# Altium PCB bh_ai8&di8_alph.PcbDoc
Units mm, origin at the board's own origin, x right, y up, seen from the top; angles counter-clockwise.
Board outline 59 x 39 mm, 2 copper layers (Top Layer, Bottom Layer); 91 components, 86 nets, 275 pads, 18 vias.
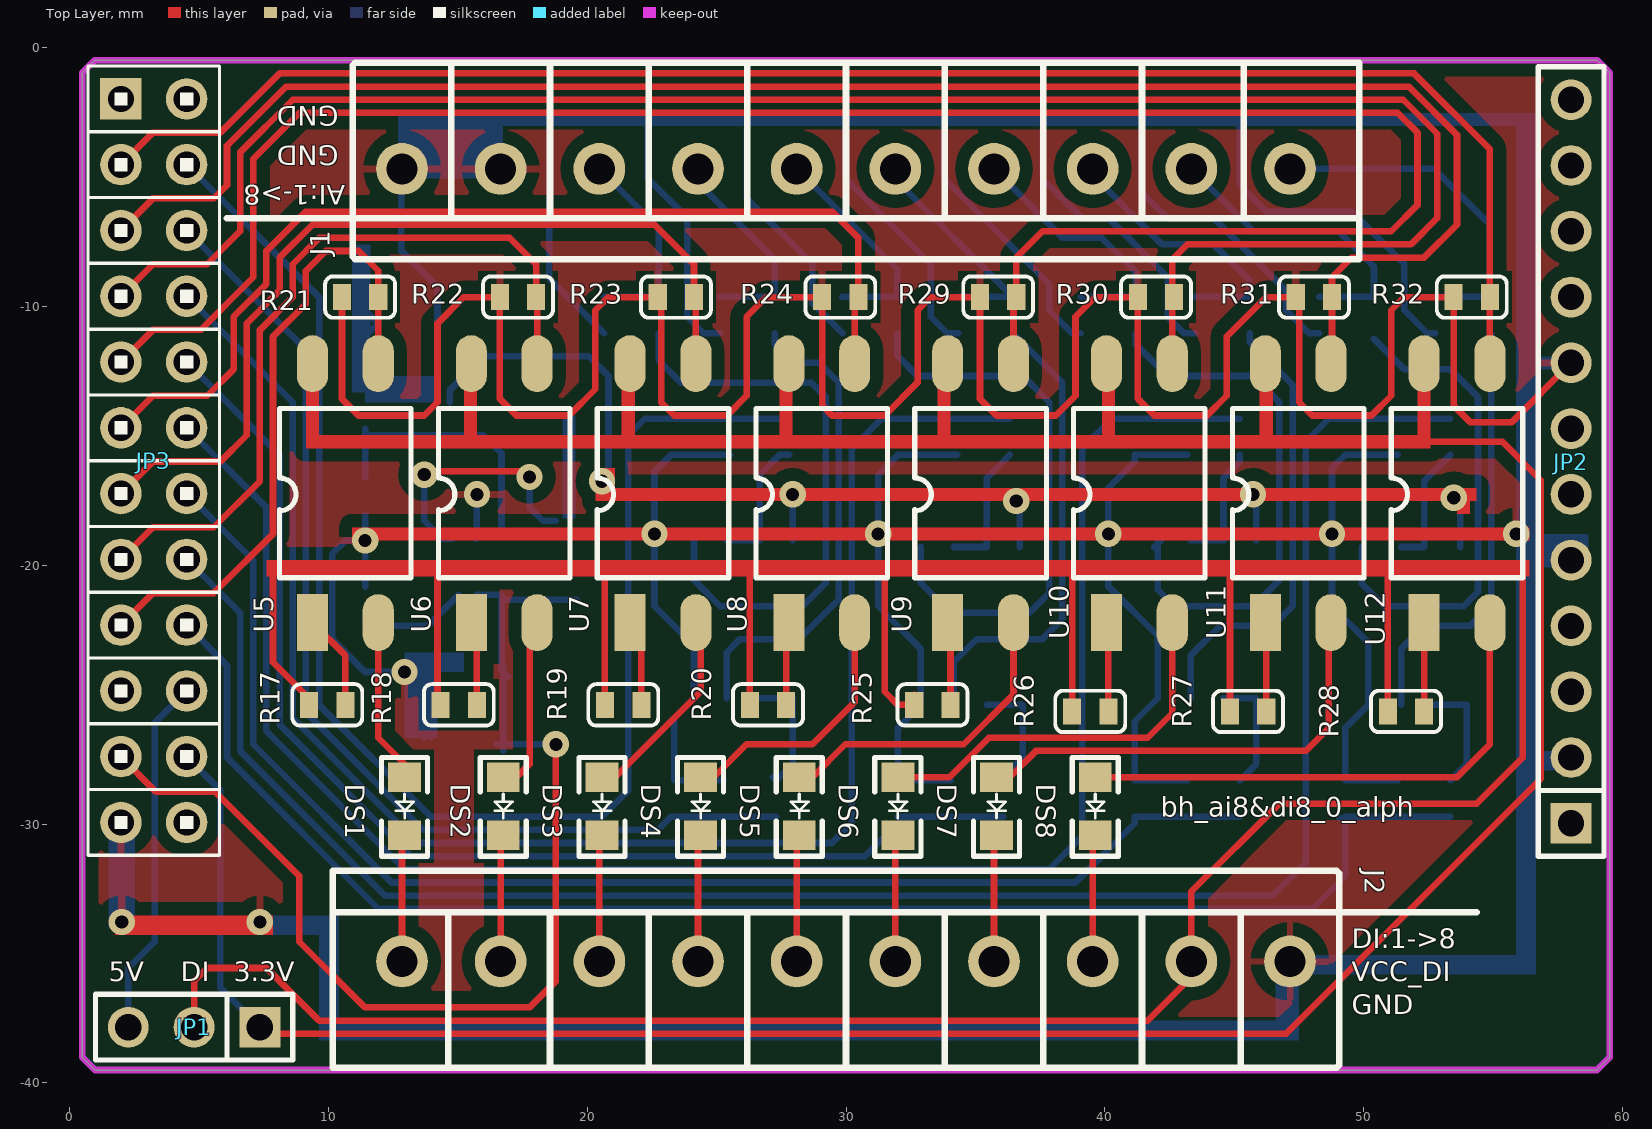
[diagram p0: Top Layer view]
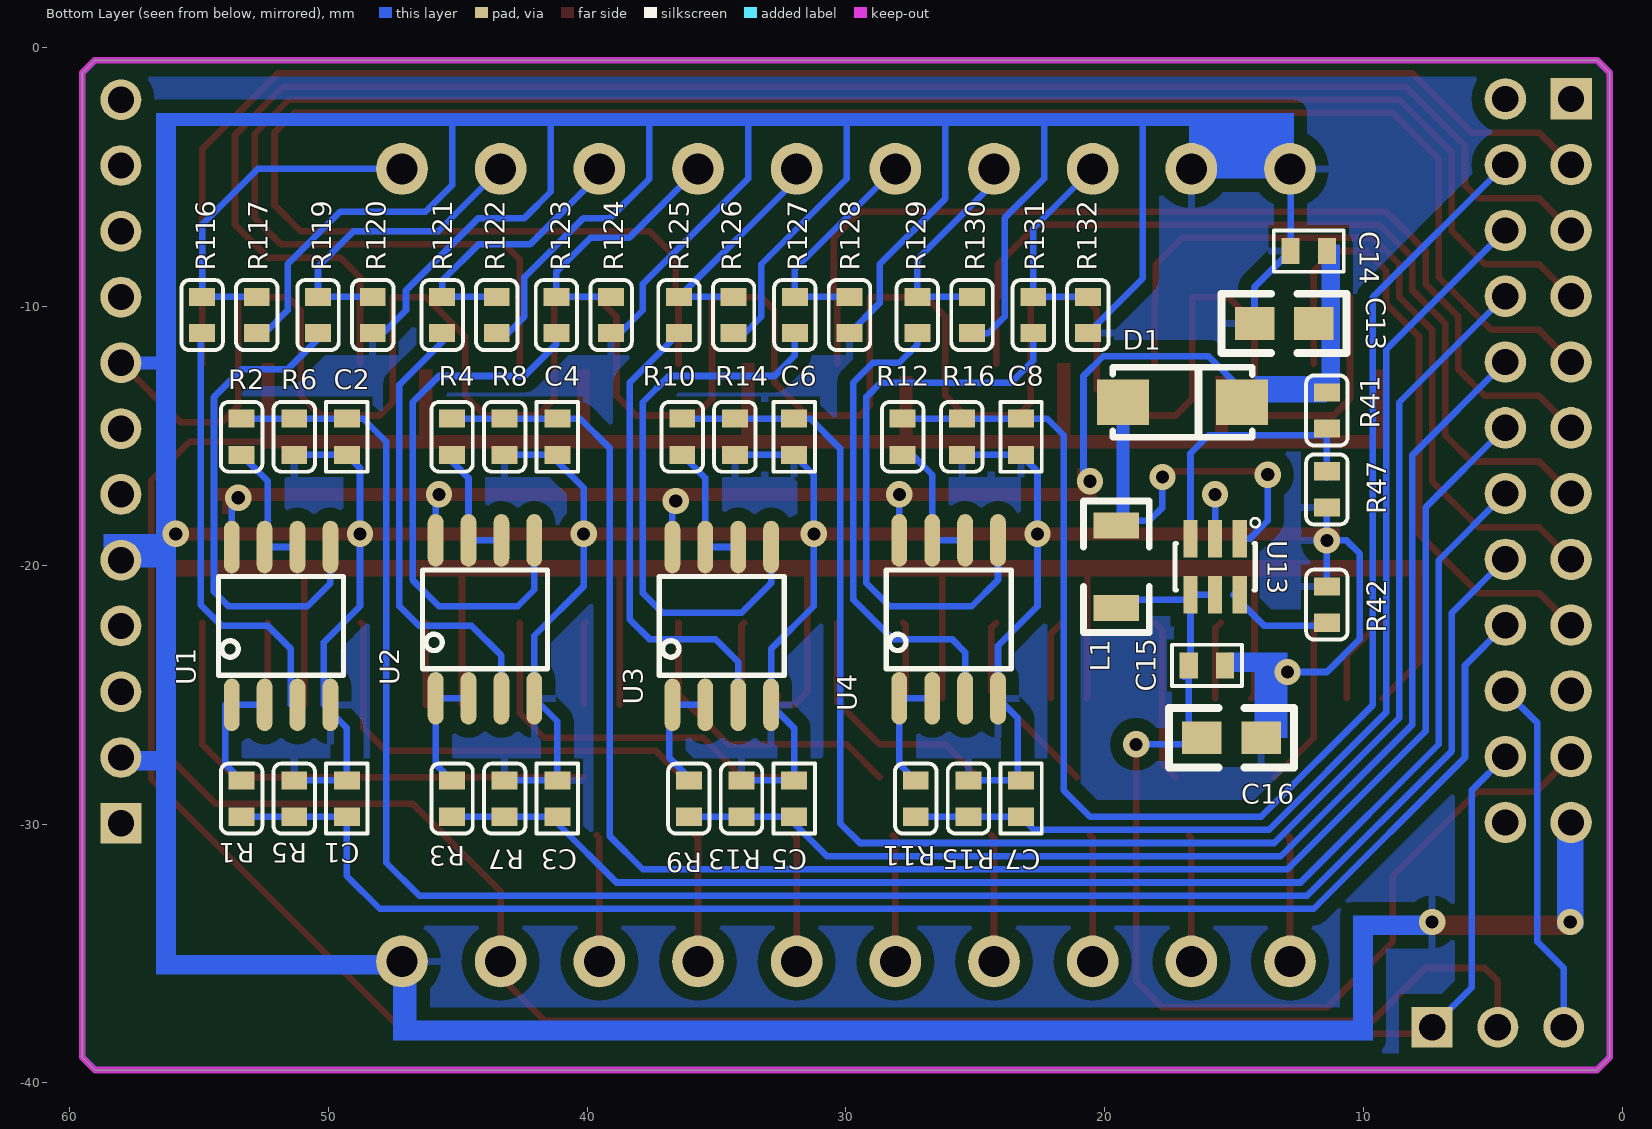
[diagram p1: Bottom Layer view, seen from below]

## Layer stack, top to bottom
Top Layer: signal copper 0.0356
Dielectric: dielectric 0.32, FR-4, Dk 4.8
Bottom Layer: signal copper 0.0356

## Board outline
0.5,-1 1,-0.5 59,-0.5 59.5,-1 59.5,-39 59,-39.5 1,-39.5 0.5,-39

## Design rules (kind name [scope] priority, off if disabled: settings)
Clearance Clearance_1 [(InPolygon)] p1: gap=0.508
Clearance [All] p2: gap=0.254
MinimumSolderMaskSliver [All] p1 off: minsoldermaskwidth=0.254
PolygonConnect [All] p1: connectstyle=Relief reliefconductorwidth=0.254 reliefentries=4 polygonreliefangle="90 Angle"
RoutingVias [All] p1: holewidth=0.508 width=1.016 viastyle="Through Hole" minholewidth=0.508 minwidth=1.016 maxholewidth=0.508 maxwidth=1.016
SilkToSilkClearance [All] p1: silktosilkclearance=0.127
SilkscreenOverComponentPads [All] p1 off: minsilkscreentomaskgap=0.127
SolderMaskExpansion [All] p1: expansion=0.102
Width Width_1 [(InNet('GND') OR InNet('VBUS') OR InNet('VCC_7.2V') OR InNet('VCC_BASE_5V') OR InNet('VCC_DI') OR InNet('VCC_SENSOR_3.3V') OR InNet('VCC_SENSOR_5V'))] p1: maxlimit=0.508 minlimit=0.254 preferedwidth=0.508 minimp=50.000000 maximp=50.000000 favimp=50.000000
Width [All] p2: maxlimit=0.254 minlimit=0.254 preferedwidth=0.254
25 further rules are at their usual default settings.

## Components (designator, comment, footprint, x,y, rotation, side; value= is the part's Value field where it differs from the comment)
C1 "CAP-SMD" C0603 49.276,-29.718 r90 bottom
C2 "CAP-SMD" C0603 49.276,-14.348 r270 bottom
C3 "CAP-SMD" C0603 41.148,-29.718 r90 bottom
C4 "CAP-SMD" C0603 41.148,-14.348 r270 bottom
C5 "CAP-SMD" C0603 32.004,-29.718 r90 bottom
C6 "CAP-SMD" C0603 32.004,-14.348 r270 bottom
C7 "CAP-SMD" C0603 23.241,-29.718 r90 bottom
C8 "CAP-SMD" C0603 23.241,-14.348 r270 bottom
C13 "22uF/16V" C0805 11.938,-10.668 r0 bottom
C14 "0.1uF" C0603 11.43,-7.874 r0 bottom
C15 "0.1uF" C0603 16.764,-23.876 r180 bottom
C16 "10uF/6.3V" C0805 16.256,-26.67 r180 bottom
D1 "SM340A" DO-214 19.304,-13.716 r180 bottom
DS1 "LED" D0805 12.954,-28.194 r270 top
DS2 "LED" D0805 16.764,-28.194 r270 top
DS3 "LED" D0805 20.574,-28.194 r270 top
DS4 "LED" D0805 24.384,-28.194 r270 top
DS5 "LED" D0805 28.194,-28.194 r270 top
DS6 "LED" D0805 32.004,-28.194 r270 top
DS7 "LED" D0805 35.814,-28.194 r270 top
DS8 "LED" D0805 39.624,-28.194 r270 top
J1 "SIP1X10" CON10*0.381 30,-4.699 r90 top
J2 "SIP1X10" CON10*0.381 30,-35.306 r270 top
JP1 "JUMPER3" SIP1X3X2.54 7.366,-37.846 r180 top
JP2 "SPI/UART Connector" SIP1x12x2.54 58,-29.972 r90 top locked
JP3 "Sensor Connector" SIP2X12X2.54 2,-2 r270 top locked
L1 "INDUCTOR" R1206 19.558,-20.066 r90 bottom
R1 "10k 1%" R0603 53.34,-28.318 r270 bottom
R2 "10k 1%" R0603 53.34,-14.348 r270 bottom
R3 "10k 1%" R0603 45.212,-28.318 r270 bottom
R4 "10k 1%" R0603 45.212,-14.348 r270 bottom
R5 "10k 1%" R0603 51.308,-29.718 r90 bottom
R6 "10k 1%" R0603 51.308,-14.348 r270 bottom
R7 "10k 1%" R0603 43.18,-29.718 r90 bottom
R8 "10k 1%" R0603 43.18,-14.348 r270 bottom
R9 "10k 1%" R0603 36.068,-28.318 r270 bottom
R10 "10k 1%" R0603 36.322,-14.348 r270 bottom
R11 "10k 1%" R0603 27.305,-28.318 r270 bottom
R12 "10k 1%" R0603 27.813,-14.348 r270 bottom
R13 "10k 1%" R0603 34.036,-29.718 r90 bottom
R14 "10k 1%" R0603 34.29,-14.348 r270 bottom
R15 "10k 1%" R0603 25.273,-29.718 r90 bottom
R16 "10k 1%" R0603 25.527,-14.348 r270 bottom
R17 "2k" R0603 10.668,-25.4 r180 top
R18 "2k" R0603 15.748,-25.4 r180 top
R19 "2k" R0603 22.098,-25.4 r180 top
R20 "2k" R0603 27.686,-25.4 r180 top
R21 "2k" R0603 11.938,-9.652 r180 top
R22 "2k" R0603 18.034,-9.652 r180 top
R23 "2k" R0603 24.13,-9.652 r180 top
R24 "2k" R0603 30.48,-9.652 r180 top
R25 "2k" R0603 34.036,-25.4 r180 top
R26 "2k" R0603 40.132,-25.654 r180 top
R27 "2k" R0603 46.228,-25.654 r180 top
R28 "2k" R0603 52.324,-25.654 r180 top
R29 "2k" R0603 36.576,-9.652 r180 top
R30 "2k" R0603 42.672,-9.652 r180 top
R31 "2k" R0603 48.768,-9.652 r180 top
R32 "2k" R0603 54.864,-9.652 r180 top
R41 "110k 1%" R0603 11.43,-14.732 r90 bottom
R42 "18k" R0603 11.43,-20.828 r270 bottom
R47 "10k 1%" R0603 11.43,-17.78 r90 bottom
R116 "RES" R0603 54.864,-11.046 r90 bottom
R117 "RES" R0603 52.753,-9.646 r270 bottom
R119 "RES" R0603 50.388,-11.046 r90 bottom
R120 "RES" R0603 48.277,-9.646 r270 bottom
R121 "RES" R0603 45.596,-11.046 r90 bottom
R122 "RES" R0603 43.485,-9.646 r270 bottom
R123 "RES" R0603 41.182,-11.046 r90 bottom
R124 "RES" R0603 39.071,-9.646 r270 bottom
R125 "RES" R0603 36.452,-11.046 r90 bottom
R126 "RES" R0603 34.341,-9.646 r270 bottom
R127 "RES" R0603 31.976,-11.046 r90 bottom
R128 "RES" R0603 29.865,-9.646 r270 bottom
R129 "RES" R0603 27.246,-11.046 r90 bottom
R130 "RES" R0603 25.135,-9.646 r270 bottom
R131 "RES" R0603 22.77,-11.046 r90 bottom
R132 "RES" R0603 20.659,-9.646 r270 bottom
U1 "LM358N" SO8NB 51.816,-22.352 r180 bottom
U2 "LM358N" SO8NB 43.942,-22.098 r180 bottom
U3 "LM358N" SO8NB 34.798,-22.352 r180 bottom
U4 "LM358N" SO8NB 26.035,-22.098 r180 bottom
U5 "PC817" SOP_4 9.398,-22.098 r0 top
U6 "PC817" SOP_4 15.53,-22.098 r0 top
U7 "PC817" SOP_4 21.663,-22.098 r0 top
U8 "PC817" SOP_4 27.795,-22.098 r0 top
U9 "PC817" SOP_4 33.927,-22.098 r0 top
U10 "PC817" SOP_4 40.059,-22.098 r0 top
U11 "PC817" SOP_4 46.192,-22.098 r0 top
U12 "PC817" SOP_4 52.324,-22.098 r0 top
U13 "FP6291" SOT23-6 15.748,-20.066 r180 bottom

## Footprints (in the part's own frame and the unit in brackets; to place one, negate y for a bottom-side part, rotate by r counter-clockwise, add the part's x,y. Pads: shape width x height; smd on the part's side, far side on the other; paste and mask are expansions set on the pad)
C0603 [mm]
  rect 0.7x1 smd: 1(0,0) 2(1.4,0)
  silkscreen extent -0.65,-0.8 2.05,0.8, body extent -0.09,-0.38 1.51,0.42, height 0.3
C0805 [mil]
  rect 60x50 smd: 1(0,0) 2(90,0)
  silkscreen extent -50,-45 140,45, body extent 6,-25 84,25, height 31
CON10*0.381 [mm]
  round 2 hole 1.2: 1(0,-17.145) 2(0,-13.335) 3(0,-9.525) 4(0,-5.715) 5(0,-1.905) 6(0,1.905) 7(0,5.715) 8(0,9.525) 9(0,13.335) 10(0,17.145)
  silkscreen extent -3.5,-19.81 4.1,19.05
D0805 [mil]
  rect 45x50 smd: A(0,0) K(88,0)
  silkscreen extent -30,-35 120,35, body extent 7,-20 88,16, height 33
DO-214 [mm]
  rect 2x1.75 smd: 1(0,0) 2(4.6,0)
  silkscreen extent -0.4,-1.35 5,1.35, body extent -0.2,-1.34 4.91,1.33, height 2.12
R0603 [mm]
  rect 0.7x1 smd: 1(0,0) 2(1.4,0)
  silkscreen extent -0.65,-0.8 2.05,0.8, body extent -0.1,-0.4 1.5,0.4, height 0.3
R1206 [mm] "Chip Resistor, 2-Leads, Body 3.2x1.6mm, IPC Medium Density"
  rect 1x1.75 smd: 1(-1.6,0) 2(1.6,0)
  silkscreen extent -2.54,-1.27 2.54,1.27, body extent -1.65,-0.8 1.65,0.8, height 0.6
SIP1X3X2.54 [mil]
  rect 62x62 hole 40: 1(0,0)
  round 62 hole 40: 2(100,0) 3(200,0)
  silkscreen extent -50,-50 250,50, body extent -49,-53 253,47, height 340
SIP1x12x2.54 [mil]
  rect 62x62 hole 40: 1(0,0)
  round 62 hole 40: 2(100,0) 3(200,0) 4(300,0) 5(400,0) 6(500,0) 7(600,0) 8(700,0) 9(800,0) 10(900,0) 11(1000,0) 12(1100,0)
  silkscreen extent -50,-50 1150,50
SIP2X12X2.54 [mil]
  rect 63x63 hole 40: 1(0,0)
  round 63 hole 40: 2(0,100) 3(100,0) 4(100,100) 5(200,0) 6(200,100) 7(300,0) 8(300,100) 9(400,0) 10(400,100) 11(500,0) 12(500,100) 13(600,0) 14(600,100) 15(700,0) 16(700,100) 17(800,0) 18(800,100) 19(900,0) 20(900,100) 21(1000,0) 22(1000,100) 23(1100,0) 24(1100,100)
  silkscreen extent -50,-50 1150,150, body extent -51,-52 1148,150, height 340
SO8NB [mil]
  oval 24x80 smd: 1(-75,-120) 2(-25,-120) 3(25,-120) 4(75,-120) 5(75,120) 6(25,120) 7(-25,120) 8(-75,120)
  silkscreen extent -95,-75 95,75, body extent -97,-118 96,118, height 61
SOP_4 [mm] "SOP_4"
  rect 1.2x2.2 smd: 1(0,-0.127)
  oval 1.2x2.2 smd: 2(2.54,-0.127) 3(2.54,9.873) 4(0,9.873)
  silkscreen extent -1.27,1.61 3.81,8.14
SOT23-6 [mm] "SOT-23/SC-74A; 5 Leads; Body 3.1 x 3 mm, inc. leads (LxW max)"
  rect 0.55x1.45 smd: 1(0.95,1.075) 2(0,1.075) 3(-0.95,1.075) 4(-0.95,-1.075) 5(0,-1.075) 6(0.95,-1.075)
  silkscreen extent -1.55,-0.9 1.72,1.88, body extent -1.4,-1.19 1.4,1.23, height 1.08

## Part data
C1 C2 C3 C4 C5 C6 C7 C8: "SMD-CAP"
C13 C14 C15 C16: library part CAP-SMD, "SMD-CAP"
D1: library part "DIODE SCHOTTKY", "Schottky Diode"
J1 J2: "Connector"
JP1: "Jumper"
JP2: library part SIP1X12, "12 Pin Header"
JP3: library part SIP2X12
L1: "Inductor"
R1 R2 R3 R4 R5 R6 R7 R8 R9 R10 R11 R12 R13 R14 R15 R16 R17 R18 R19 R20 R21 R22 R23 R24 R25 R26 R27 R28 R29 R30 R31 R32 R41 R42 R47: library part RES, "Resistor"
R116 R117 R119 R120 R121 R122 R123 R124 R125 R126 R127 R128 R129 R130 R131 R132: "Resistor"
U5 U6 U7 U8 U9 U10 U11 U12: library part P521*1

## Via types
v1: diameter 1.016, hole 0.508, Top Layer to Bottom Layer, 18 vias

## Nets (pads, with @x,y where several pads share a name; then routed paths per layer and width w, separated by ;. In a path a pad name is that pad's centre, name@x,y a point inside that pad or via, vN(x,y) a via of type N, cw(c..) or ccw(c..) an arc to the next point about the centre after c; other vN are vias at no path point)
AD0: C1.1 JP3.18 R1.2 R5.1 | length 58.4
  Bottom Layer w0.254: JP3.18 6.096,-23.876 6.096,-27.432 11.938,-33.274 48.006,-33.274 49.276,-32.004 C1.1 R1.2 ; C1.1@49.022,-29.718 C1.1@49.149,-29.845
AD1: C2.1 JP3.16 R2.1 R6.1 | length 74.5
  Bottom Layer w0.254: JP3.16 6.604,-21.844 6.604,-27.178 12.192,-32.766 46.482,-32.766 47.752,-31.496 47.752,-15.24 48.644,-14.348 C2.1 R6.1 R2.1
AD2: C3.1 JP3.14 R3.2 R7.1 | length 52.3
  Bottom Layer w0.254: JP3.14 7.112,-19.812 7.112,-26.924 12.446,-32.258 38.862,-32.258 41.148,-29.972 C3.1 R3.2
AD3: C4.1 JP3.12 R4.1 R8.1 | length 68.8
  Bottom Layer w0.254: JP3.12 7.62,-17.78 7.62,-26.416 12.954,-31.75 37.846,-31.75 39.116,-30.48 39.116,-15.494 40.262,-14.348 C4.1 R8.1 R4.1
AD4: C5.1 JP3.10 R9.2 R13.1 | length 46.1
  Bottom Layer w0.254: JP3.10 8.128,-15.748 8.128,-26.162 13.208,-31.242 30.734,-31.242 C5.1@32.004,-29.972 ; C5.1 R9.2
AD5: C6.1 JP3.8 R10.1 R14.1 | length 62.9
  Bottom Layer w0.254: JP3.8 8.636,-13.716 8.636,-25.908 13.462,-30.734 29.464,-30.734 30.226,-29.972 30.226,-15.494 31.372,-14.348 C6.1 R14.1 R10.1
AD6: C7.1 JP3.6 R11.2 R15.1 | length 40.8
  Bottom Layer w0.254: JP3.6 9.144,-11.684 9.144,-25.698 13.672,-30.226 22.733,-30.226 C7.1 R15.1 R11.2
AD7: C8.1 JP3.4 R12.1 R16.1 | length 57.3
  Bottom Layer w0.254: JP3.4 9.652,-9.652 9.652,-25.4 13.97,-29.718 20.574,-29.718 21.59,-28.702 21.59,-14.986 22.228,-14.348 C8.1 R16.1 R12.1
AI0: R116.1 U1.3 | length 16.9
  Bottom Layer w0.254: U1.3@51.435,-25.4 51.435,-23.241 52.324,-22.352 54.102,-22.352 54.915,-21.539 54.915,-11.097 R116.1
AI1: R119.1 U1.5 | length 19
  Bottom Layer w0.254: U1.5 49.911,-20.701 50.8,-21.59 53.848,-21.59 54.407,-21.031 54.407,-13.513 53.34,-12.446 51.562,-12.446 R119.1@50.388,-11.272
AI2: R121.1 U2.3 | length 17.6
  Bottom Layer w0.254: U2.3 43.307,-23.495 44.45,-22.352 46.482,-22.352 47.244,-21.59 47.244,-13.041 45.596,-11.393 R121.1
AI3: R123.1 U2.5 | length 21.4
  Bottom Layer w0.254: R123.1 41.182,-11.464 42.418,-12.7 45.72,-12.7 46.736,-13.716 46.736,-20.574 45.72,-21.59 42.672,-21.59 42.037,-20.955 U2.5@42.037,-19.177 ; U2.5@41.91,-19.304 U2.5@42.037,-19.177 ; U2.5 U2.5@42.037,-19.177 ; U2.5@42.164,-19.05 U2.5@42.037,-19.177
AI4: R125.1 U3.3 | length 18.4
  Bottom Layer w0.254: U3.3 34.163,-23.749 35.052,-22.86 37.592,-22.86 38.354,-22.098 38.354,-12.948 R125.1
AI5: R127.1 U3.5 | length 22
  Bottom Layer w0.254: R127.1 31.976,-11.91 32.766,-12.7 36.83,-12.7 37.846,-13.716 37.846,-21.082 37.084,-21.844 34.036,-21.844 32.893,-20.701 U3.5
AI6: R129.1 U4.3 | length 18.8
  Bottom Layer w0.254: U4.3 25.4,-23.368 25.908,-22.86 28.194,-22.86 29.718,-21.336 29.718,-12.954 28.956,-12.192 27.94,-12.192 27.246,-11.498 R129.1
AI7: R131.1 U4.5 | length 22.7
  Bottom Layer w0.254: R131.1 22.77,-12.102 23.622,-12.954 28.658,-12.954 29.21,-13.506 29.21,-20.701 28.321,-21.59 25.146,-21.59 24.13,-20.574 U4.5
DI0: DS1.K J2.1 | length 4.9
  Top Layer w0.254: J2.1 12.855,-30.528 DS1.K
DI1: DS2.K J2.2 | length 4.9
  Top Layer w0.254: J2.2 16.665,-30.528 DS2.K
DI2: DS3.K J2.3 | length 4.9
  Top Layer w0.254: J2.3 20.475,-30.528 DS3.K
DI3: DS4.K J2.4 | length 4.9
  Top Layer w0.254: J2.4 24.285,-30.528 DS4.K
DI4: DS5.K J2.5 | length 4.9
  Top Layer w0.254: J2.5 28.095,-30.528 DS5.K
DI5: DS6.K J2.6 | length 4.9
  Top Layer w0.254: J2.6 31.905,-30.528 DS6.K
DI6: DS7.K J2.7 | length 4.9
  Top Layer w0.254: J2.7 35.715,-30.528 DS7.K
DI7: DS8.K J2.8 | length 4.9
  Top Layer w0.254: J2.8 39.525,-30.528 DS8.K
EX_RXD2: JP2.4
EX_RXD5: JP2.7
EX_SPI_CS: JP2.9
EX_TXD2: JP2.3
EX_TXD5: JP2.6
GND: C1.2 C2.2 C3.2 C4.2 C5.2 C6.2 C7.2 C8.2 C13.2 C14.2 C15.2 C16.2 J1.9 J1.10 J2.10 JP2.2 JP2.5 JP2.8 JP3.23 R5.2 R6.2 R7.2 R8.2 R13.2 R14.2 R15.2 R16.2 R21.2 R22.2 R23.2 R24.2 R29.2 R30.2 R31.2 R32.2 R42.1 R47.1 R117.2 R120.2 R122.2 R124.2 R126.2 R128.2 R130.2 R132.2 U1.4 U2.4 U3.4 U4.4 U13.2 | length 294.1
  Top Layer w0.254: R21.2 10.538,-13.586 11.176,-14.224 13.716,-14.224 14.224,-13.716 14.224,-10.668 15.24,-9.652 R22.2 16.634,-13.586 17.272,-14.224 19.304,-14.224 20.32,-13.208 20.32,-10.16 20.828,-9.652 R23.2 22.86,-9.652 22.86,-13.716 23.368,-14.224 25.4,-14.224 26.162,-13.462 26.162,-10.414 26.924,-9.652 R24.2 29.08,-13.84 29.464,-14.224 31.496,-14.224 32.766,-12.954 32.766,-10.16 33.274,-9.652 R29.2 35.176,-13.586 35.814,-14.224 38.1,-14.224 38.862,-13.462 38.862,-10.414 39.624,-9.652 R30.2 41.272,-13.586 41.91,-14.224 43.942,-14.224 44.704,-13.462 44.704,-11.176 46.228,-9.652 47.498,-9.652 47.498,-13.716 48.006,-14.224 50.292,-14.224 51.054,-13.462 51.054,-10.16 51.562,-9.652 R32.2 53.464,-13.84 54.102,-14.478 55.714,-14.478 JP2.8 ; J1.9 J1.9@16.891,-4.699
  Bottom Layer w0.254: v1@2,-33.75 v1(2.032,-33.782) ; R42.1 v1@11.43,-19.304 ; R47.1@11.43,-18.034 v1(11.43,-19.05) ; v1(12.954,-24.13) v1@13.208,-23.876 ; v1@13.208,-24.13 11.43,-24.13 10.16,-22.86 10.16,-19.558 10.668,-19.05 v1(11.43,-19.05) ; C16.2@13.716,-26.67 C16.2@13.843,-26.543 ; C16.2 C16.2@13.843,-26.543 ; C16.2@13.97,-26.416 C16.2@13.843,-26.543 ; C13.2 14.224,-9.268 C14.2 12.83,-4.724 J1.10 J1.9 ; U13.2 v1(15.748,-17.272) ; 18.542,-2.794 18.542,-8.929 R132.2 ; 22.352,-2.794 22.352,-5.08 23.876,-6.604 23.876,-10.414 24.508,-11.046 R130.2 ; C7.2@23.368,-28.318 23.368,-25.908 U4.4 24.13,-23.114 22.606,-21.59 22.606,-16.383 C8.2 R16.2 ; C7.2@23.368,-28.191 23.495,-28.318 R15.2 ; 26.162,-2.794 26.162,-5.842 28.702,-8.382 28.702,-9.883 R128.2 ; 29.972,-3.048 29.972,-5.08 33.274,-8.382 33.274,-10.414 33.906,-11.046 R126.2 ; 33.782,-2.794 33.782,-5.08 37.846,-9.144 37.846,-10.16 38.732,-11.046 R124.2 ; R13.2 C5.2 32.004,-26.289 U3.4 32.893,-23.241 31.242,-21.59 v1(31.242,-18.796) 31.242,-16.51 C6.2 R14.2 ; 37.592,-2.794 37.592,-5.08 39.116,-6.604 40.132,-6.604 42.418,-8.89 42.418,-10.414 43.05,-11.046 R122.2 ; C3.2@41.275,-28.318 R7.2 ; C3.2@41.275,-28.191 C3.2 41.148,-26.035 U2.4 42.037,-22.733 40.132,-20.828 40.132,-17.018 41.148,-16.002 C4.2 R8.2 ; 41.402,-2.794 41.402,-5.588 42.418,-6.604 44.196,-6.604 46.99,-9.398 46.99,-10.16 47.876,-11.046 R120.2 ; 45.212,-2.794 45.212,-5.334 46.228,-6.35 49.53,-6.35 51.562,-8.382 51.562,-10.16 52.448,-11.046 R117.2 ; C1.2@49.403,-28.318 R5.2 ; C1.2@49.403,-28.191 C1.2 49.276,-26.289 50.165,-25.4 50.165,-22.987 48.768,-21.59 48.768,-16.256 C2.2 R6.2 ; 56.642,-19.05 57.404,-19.812 JP2.5 ; JP2.2@57.658,-27.432 JP2.2 ; v1@11.43,-19.304 v1(11.43,-19.05) ; v1@11.43,-19.304 11.176,-19.304 v1(11.43,-19.05)
  other v1: 7.366,-33.782 22.606,-18.796 40.132,-18.796 48.768,-18.796 55.88,-18.796
IO0: 
IO1: JP3.17 R21.1 U5.3 | length 25
  Top Layer w0.254: JP3.17 3.238,-21.082 5.588,-21.082 7.874,-18.796 7.874,-11.176 9.144,-9.906 9.144,-8.636 9.906,-7.874 11.176,-7.874 11.938,-8.636 R21.1 U5.3
IO2: JP3.15 R22.1 U6.3 | length 29.6
  Top Layer w0.254: JP3.15 3.238,-18.542 5.588,-18.542 7.366,-16.764 7.366,-10.922 8.636,-9.652 8.636,-8.382 9.652,-7.366 17.018,-7.366 18.034,-8.382 R22.1 18.07,-9.688 U6.3
IO3: JP3.13 R23.1 U7.3 | length 34.2
  Top Layer w0.254: JP3.13 3.238,-16.002 5.842,-16.002 6.858,-14.986 6.858,-10.668 8.128,-9.398 8.128,-8.128 9.398,-6.858 22.606,-6.858 24.13,-8.382 R23.1 24.203,-9.725 U7.3
IO4: JP3.11 R24.1 U8.3 | length 39.2
  Top Layer w0.254: JP3.11 3.238,-13.462 5.334,-13.462 6.35,-12.446 6.35,-10.414 7.62,-9.144 7.62,-7.874 9.144,-6.35 29.464,-6.35 30.48,-7.366 R24.1 30.335,-9.797 U8.3
IO5: JP3.9 R29.1 U9.3 | length 80.3
  Top Layer w0.254: JP3.9 3.238,-10.922 5.08,-10.922 7.112,-8.89 7.112,-4.318 8.89,-2.54 51.308,-2.54 52.07,-3.302 52.07,-6.096 51.054,-7.112 37.592,-7.112 36.576,-8.128 R29.1 36.467,-9.761 U9.3
IO6: JP3.7 R30.1 U10.3 | length 74.6
  Top Layer w0.254: JP3.7 3.238,-8.382 5.334,-8.382 6.604,-7.112 6.604,-4.064 8.636,-2.032 51.518,-2.032 52.832,-3.346 52.832,-6.604 51.816,-7.62 43.18,-7.62 42.599,-8.201 R30.1@42.599,-9.725 ; U10.3 R30.1@42.599,-9.725 ; R30.1 R30.1@42.599,-9.725
IO7: JP3.5 R31.1 U11.3 | length 68
  Top Layer w0.254: JP3.5 3.238,-5.842 5.588,-5.842 6.096,-5.334 6.096,-3.81 8.382,-1.524 51.729,-1.524 53.594,-3.389 53.594,-6.858 52.324,-8.128 49.53,-8.128 48.768,-8.89 R31.1 48.768,-12.189 U11.3
IO8: JP3.3 R32.1 U12.3 | length 63.8
  Top Layer w0.254: JP3.3 3.238,-3.302 5.842,-3.302 8.128,-1.016 51.939,-1.016 54.864,-3.941 R32.1 U12.3
M_AI0: J1.1 R116.2 R117.1 | length 13.5
  Bottom Layer w0.254: J1.1 52.705,-4.699 54.864,-6.858 R116.2 R117.1
M_AI1: J1.2 R119.2 R120.1 | length 11.9
  Bottom Layer w0.254: J1.2 45.748,-7.112 49.022,-7.112 50.388,-8.478 R119.2 R120.1
M_AI2: J1.3 R121.2 R122.1 | length 10.7
  Bottom Layer w0.254: J1.3 39.525,-4.937 42.208,-7.62 44.196,-7.62 45.596,-9.02 R121.2 R122.1
M_AI3: J1.4 R123.2 R124.1 | length 10.2
  Bottom Layer w0.254: J1.4 38.382,-7.366 39.878,-7.366 41.182,-8.67 R123.2 R124.1
M_AI4: J1.5 R125.2 R126.1 | length 8.9
  Bottom Layer w0.254: J1.5 31.905,-5.099 R125.2 R126.1
M_AI5: J1.6 R127.2 R128.1 | length 8.7
  Bottom Layer w0.254: J1.6 31.976,-8.58 R127.2 R128.1
M_AI6: J1.7 R129.2 R130.1 | length 8.3
  Bottom Layer w0.254: J1.7 24.285,-5.235 27.246,-8.196 R129.2 R130.1
M_AI7: J1.8 R131.2 R132.1 | length 8
  Bottom Layer w0.254: J1.8 22.77,-6.994 R131.2 R132.1
NetD1_1: D1.1 L1.2 U13.1 | length 10.6
  Top Layer w0.254: v1(13.716,-16.51) 13.843,-16.383 17.814,-16.383 18.034,-16.603 v1(17.78,-16.603)
  Bottom Layer w0.254: v1(13.716,-16.51) 13.716,-18.288 14.419,-18.991 U13.1 ; v1(17.78,-16.603) 18.034,-16.603 17.78,-16.857 17.78,-17.78 18.288,-18.288 L1.2@18.796,-18.288
NetDS1_A: DS1.A U5.2 | length 6.6
  Top Layer w0.254: U5.2 11.938,-26.67 DS1.A@13.462,-28.194
NetDS2_A: DS2.A U6.2 | length 6.3
  Top Layer w0.254: DS2.A@17.272,-28.194 17.78,-27.686 17.78,-22.515 U6.2
NetDS3_A: DS3.A U7.2 | length 7.4
  Top Layer w0.254: DS3.A@21.082,-28.194 24.384,-24.892 24.384,-22.406 U7.2
NetDS4_A: DS4.A U8.2 | length 9.7
  Top Layer w0.254: DS4.A@24.892,-28.194 26.162,-26.924 28.702,-26.924 30.335,-25.291 U8.2
NetDS5_A: DS5.A U9.2 | length 11.9
  Top Layer w0.254: DS5.A@28.702,-28.194 29.972,-26.924 34.544,-26.924 36.467,-25.001 U9.2
NetDS6_A: DS6.A U10.2 | length 14.6
  Top Layer w0.254: DS6.A@32.512,-28.194 33.992,-28.194 35.516,-26.67 41.656,-26.67 42.599,-25.727 U10.2
NetDS7_A: DS7.A U11.2 | length 17.2
  Top Layer w0.254: DS7.A@36.322,-28.194 37.338,-27.178 47.752,-27.178 48.641,-26.289 48.641,-22.316 U11.2
NetDS8_A: DS8.A U12.2 | length 20
  Top Layer w0.254: DS8.A@40.132,-28.194 53.594,-28.194 54.864,-26.924 U12.2
NetR1_1: R1.1 U1.1 U1.2 | length 4.5
  Bottom Layer w0.254: U1.2@52.705,-25.4 53.975,-25.4 53.975,-27.683 R1.1
NetR2_2: R2.2 U1.6 U1.7 | length 4.9
  Bottom Layer w0.254: U1.6@51.435,-19.304 52.324,-19.304 52.324,-16.764 R2.2
NetR3_1: R3.1 U2.1 U2.2 | length 4.7
  Bottom Layer w0.254: U2.2 U2.1 45.847,-27.683 R3.1
NetR4_2: R4.2 U2.6 U2.7 | length 4.8
  Bottom Layer w0.254: U2.6 U2.7 44.577,-16.637 45.212,-16.002 R4.2
NetR9_1: R9.1 U3.1 U3.2 | length 4.7
  Bottom Layer w0.254: U3.2 36.83,-25.4 36.83,-27.429 R9.1@35.941,-28.318
NetR10_2: R10.2 U3.6 U3.7 | length 5.2
  Bottom Layer w0.254: U3.6 U3.7 35.433,-16.637 R10.2
NetR11_1: R11.1 U4.1 U4.2 | length 4.9
  Bottom Layer w0.254: U4.2 U4.1 27.94,-27.683 R11.1 R11.1@27.178,-28.191
NetR12_2: R12.2 U4.6 U4.7 | length 6
  Bottom Layer w0.254: U4.6 U4.7 ; 25.908,-19.05 U4.7 ; R12.2 27.432,-15.748 26.67,-16.51 U4.7
NetR17_1: R17.1 U5.1 | length 3.4
  Top Layer w0.254: U5.1 10.668,-23.495 R17.1@10.668,-25.146
NetR18_1: R18.1 U6.1 | length 3
  Top Layer w0.254: U6.1 15.748,-22.443 R18.1@15.748,-25.146
NetR19_1: R19.1 U7.1 | length 3.1
  Top Layer w0.254: U7.1 22.098,-22.66 R19.1@22.098,-25.146
NetR20_1: R20.1 U8.1 | length 3
  Top Layer w0.254: R20.1@27.686,-25.146 27.686,-22.334 U8.1
NetR25_1: R25.1 U9.1 | length 3
  Top Layer w0.254: U9.1 34.036,-22.334 R25.1@34.036,-25.146
NetR26_1: R26.1 U10.1 | length 3.2
  Top Layer w0.254: U10.1 40.132,-22.298 R26.1@40.132,-25.4
NetR27_1: R27.1 U11.1 | length 3.2
  Top Layer w0.254: U11.1 46.228,-22.261 R27.1@46.228,-25.4
NetR28_1: R28.1 U12.1 | length 3.2
  Top Layer w0.254: R28.1@52.324,-25.4 U12.1
NetR41_1: R41.1 R47.2 U13.3 | length 10.8
  Bottom Layer w0.254: R47.2@11.43,-16.634 R41.1 11.43,-14.986 16.002,-14.986 16.698,-15.682 U13.3@16.698,-18.737
NetR42_2: R42.2 U13.6 | length 4.2
  Bottom Layer w0.254: R42.2 11.554,-22.352 13.841,-22.352 U13.6@15.052,-21.141
ONE_WIRE: JP3.19
SCL: JP3.2
SCLK: JP2.11
SDA: JP3.1
SIMO: JP2.10
SOMI: JP2.12
VBUS: C15.1 C16.1 JP3.21 L1.1 U13.4 U13.5 | length 45.7
  Top Layer w0.254: JP3.21 3.359,-28.759 5.645,-28.759 8.89,-32.004 8.89,-34.544 11.43,-37.084 17.78,-37.084 18.796,-36.068 v1(18.796,-26.924) ; v1(18.796,-26.924) 19.05,-26.67 v1(18.796,-26.924)
  Bottom Layer w0.254: JP3.21@2,-27.908 JP3.21 ; U13.5 U13.4 ; C16.1@16.51,-26.924 v1(18.796,-26.924) ; C15.1@16.698,-23.81 C15.1 C16.1@16.764,-27.178 ; C15.1@16.952,-24.318 16.698,-24.064 16.698,-21.336 L1.1@19.6,-21.336
VCC_7.2V: C13.1 C14.1 D1.2 R41.2 U1.8 U2.8 U3.8 U4.8 | length 20.5
  Bottom Layer w0.254: C13.1@11.43,-11.176 C13.1 C13.1@11.43,-10.16 ; D1.2 14.704,-13.236 16.002,-11.938 20.066,-11.938 20.828,-12.7 20.828,-16.764 v1(20.574,-16.764) ; U4.8 v1@27.94,-17.526 ; v1(36.576,-17.526) 36.703,-17.653 U3.8 ; U2.8 v1@45.847,-17.272 ; v1(53.467,-17.399) 53.721,-17.399 U1.8
  other v1: 27.94,-17.272 45.72,-17.272
VCC_BASE_5V: JP3.24
VCC_DI: J2.9 JP1.2 R17.2 R18.2 R19.2 R20.2 R25.2 R26.2 R27.2 R28.2 | length 110.2
  Top Layer w0.254: JP1.2 4.826,-36.068 5.334,-35.56 7.62,-35.56 9.652,-37.592 41.656,-37.592 43.335,-35.913 J2.9 43.335,-32.611 46.736,-29.21 54.356,-29.21 56.134,-27.432 56.134,-20.066 ; 7.874,-20.066 7.874,-23.752 R17.2@9.268,-25.146 ; 14.224,-20.066 14.224,-25.022 R18.2@14.348,-25.146 ; 20.682,-20.428 20.682,-25.13 R19.2@20.698,-25.146 ; R20.2@26.286,-25.146 26.286,-20.444 ; 31.496,-20.066 31.496,-24.892 32.004,-25.4 R25.2 ; R25.2@32.636,-25.146 R25.2@32.636,-25.009 ; R26.2@38.732,-25.4 38.732,-20.19 ; R27.2@44.828,-25.4 44.828,-19.936 ; R28.2@50.924,-25.4 50.924,-20.066
VCC_SENSOR_3.3V: JP1.1 JP3.22 U5.4 U6.4 U7.4 U8.4 U9.4 U10.4 U11.4 U12.4 | length 82.3
  Top Layer w0.254: JP1.1@7.112,-38.1 46.99,-38.1 56.832,-28.258 56.832,-16.724 55.348,-15.24 52.07,-15.24
  Bottom Layer w0.254: JP3.22 5.842,-28.702 5.842,-36.322 JP1.1
VCC_SENSOR_5V: JP1.3 JP3.20 | length 13.9
  Bottom Layer w0.254: JP1.3 2.286,-35.56 3.302,-34.544 3.302,-26.098 JP3.20
pads on no net: JP2.1

## Polygon pours and split planes (outlines as drawn)
GND on Bottom Layer "Top Layer-No Net" (solid, remove dead copper, pour order 1000): 0.5,-1 1,-0.5 59,-0.5 59.5,-1 59.5,-39 59,-39.5 1,-39.5 0.5,-39
GND on Top Layer "Top Layer-No Net" (solid, remove dead copper, pour order 1001): 0.5,-1 1,-0.5 59,-0.5 59.5,-1 59.5,-39 59,-39.5 1,-39.5 0.5,-39

## Keep-outs
Keep-Out Layer:
  lines w0.254: 1,-39.5 59,-39.5 59.5,-39 ; 1,-39.5 1,-39.5 ; 1,-39.5 0.5,-39 0.5,-1 1,-0.5 59,-0.5 59.5,-1 59.5,-39 ; 59.5,-39 59.5,-39

## Other copper
Top Layer:
  rectangle net VCC_7.2V: 53.594,-18.034 54.102,-17.018
  rectangle net VCC_7.2V: 20.32,-17.272 21.082,-16.256
  rectangle net GND: 10.922,-19.05 56.388,-18.542
  rectangle net VCC_7.2V: 20.32,-17.526 54.356,-17.018
  rectangle net GND: 1.778,-34.29 7.874,-33.528
  rectangle net VCC_DI: 7.62,-20.444 56.388,-19.812
  rectangle net VCC_SENSOR_3.3V: 9.144,-15.494 9.652,-12.446
  rectangle net VCC_SENSOR_3.3V: 15.24,-15.494 15.748,-12.7
  rectangle net VCC_SENSOR_3.3V: 21.336,-15.24 21.844,-12.192
  rectangle net VCC_SENSOR_3.3V: 27.432,-15.494 27.94,-12.7
  rectangle net VCC_SENSOR_3.3V: 33.528,-15.24 34.036,-12.192
  rectangle net VCC_SENSOR_3.3V: 39.878,-15.494 40.386,-12.446
  rectangle net VCC_SENSOR_3.3V: 45.974,-15.494 46.482,-12.446
  rectangle net VCC_SENSOR_3.3V: 52.07,-15.24 52.578,-12.192
  rectangle net VCC_SENSOR_3.3V: 9.144,-15.494 52.578,-14.986
Bottom Layer:
  rectangle net GND: 13.716,-24.13 15.24,-23.368
  rectangle net GND: 12.954,-26.67 14.224,-23.368
  rectangle net NetD1_1: 19.05,-18.212 19.558,-14.224
  rectangle net GND: 12.7,-5.08 16.764,-2.54
  rectangle net GND: 16.51,-3.048 45.466,-2.54
  rectangle net VCC_7.2V: 11.43,-13.716 14.224,-12.7
  rectangle net VCC_7.2V: 10.922,-13.332 11.647,-7.62
  rectangle net GND: 45.212,-3.048 56.642,-2.54
  rectangle net GND: 56.642,-12.446 57.912,-11.938
  rectangle net GND: 55.88,-18.796 56.642,-2.794
  rectangle net GND: 46.581,-38.1 47.498,-35.306
  rectangle net GND: 9.652,-38.354 47.498,-37.592
  rectangle net GND: 9.652,-38.354 10.414,-33.782
  rectangle net GND: 7.366,-34.29 10.414,-33.528
  rectangle net GND: 1.524,-34.036 2.54,-29.972
  rectangle net GND: 46.99,-35.814 56.134,-35.052
  rectangle net GND: 56.134,-27.94 57.658,-27.178
  rectangle net GND: 55.88,-35.814 56.642,-19.812
  rectangle net GND: 55.88,-20.099 58.674,-18.796

## Silkscreen, mask and mechanical layers (free items; w line width, h text height)
Top Overlay:
  lines w0.254: 6.096,-6.604 10.95,-6.604 ; 48.95,-39.406 49.041,-39.315 ; 49.05,-33.401 54.356,-33.401
  text "GND" at 10.414,-2.286 h0.76 r180
  text "GND" at 10.414,-3.81 h0.76 r180
  text "AI:1->8" at 10.668,-5.334 h0.76 r180
  text "bh_ai8&di8_0_alph" at 42.164,-29.718 h0.76
  text "DI:1->8" at 49.53,-34.798 h0.76
  text "5V" at 1.524,-36.068 h0.76
  text "DI" at 4.318,-36.068 h0.76
  text "3.3V" at 6.35,-36.068 h0.76
  text "VCC_DI" at 49.53,-36.068 h0.76
  text "GND" at 49.53,-37.338 h0.76